# Altium PCB PCB_ESP32.PcbDoc (part 2 of 2)
Units mil, origin at the board's own origin, x right, y up, seen from the top; angles counter-clockwise.
Board outline 2930 x 1000 mil, 4 copper layers (Top Layer, Layer 1, Layer 2, Bottom Layer), stack 63.142 mil thick; 64 components, 73 nets, 299 pads, 165 vias.
Unrouted connection lines stored in the file: 3.
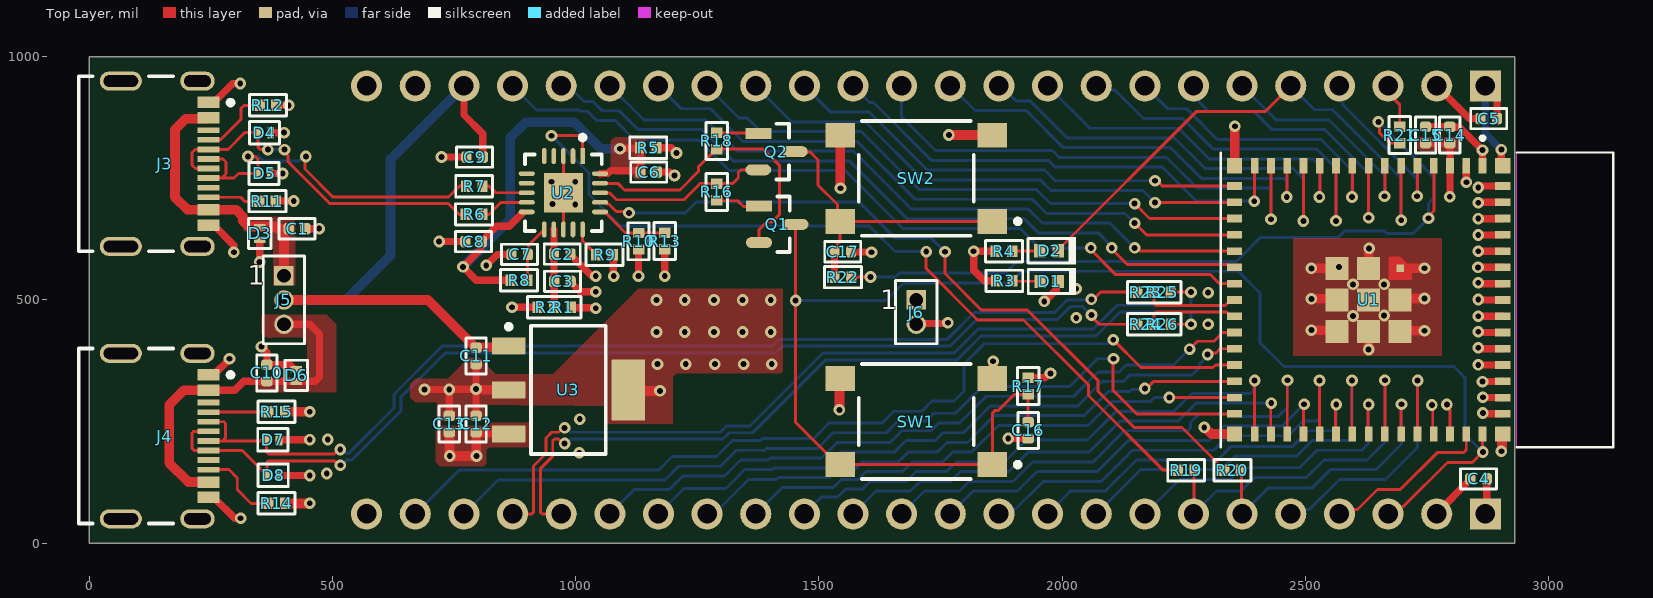
[diagram p0: Top Layer view]

## Part data (continued)
U3: "IC REG LINEAR 3.3V 1.5A SOT223-4", Case/Package=SOP, Dropout Voltage1-Max=550mV, Dropout Voltage1-Nom=340mV, Input Voltage Absolute-Max=20V, LCSC Part Number=C181262, Manufacturer="Texas Instruments", Min Input Voltage=3.8V, Operating Temperature, TJ-Max=125°C, Operating Temperature, TJ-Min=-40°C, Output Current1-Max=1.5A, Output Voltage1-Max=3.4V, Output Voltage1-Min=3.2V, Output Voltage1-Nom=3.3V, Package Body Material=Plastic, Package Shape=Rectangular, Package Style="SMALL OUTLINEMeter", Peak Reflow Temperature (Cel)=260°C, Supplier Part Number=296-24897-1-ND, Voltage Tolerance-Max=3%, Adjustability=FIXED, Category="Voltage Regulators - Linear", Channels=1, ComponentLink1Description=https://www.ti.com:443/lit/ds/symlink/tl1963a.pdf?src-supplier=IHS+Markit, ComponentLink1URL=https://www.ti.com:443/lit/ds/symlink/tl1963a.pdf?src-supplier=IHS+Markit, ComponentLink2Description=https://datasheet.ciiva.com/2046/-2046068.pdf?src-supplier=Digikey, ComponentLink2URL=https://datasheet.ciiva.com/2046/-2046068.pdf?src-supplier=Digikey, Height - Seated (Max)=1.8mm, JESD-30 Code=R-PDSO-G4, JESD-609 Code=e3, Length=6.5mm, Line Regulation-Max=0.01%, Load Regulation-Max=0.07%, Manufacturer Part Number=TL1963A-33DCYR, Max Supply Voltage=20V, Moisture Sensitivity Level=2, Number of Outputs=1, Packaging="Tape and Reel", Pins=4, Pricing="1=2.91, 10=2.614, 25=2.4712, 100=2.1417, 250=2.03188, 500=1.8232, 1000=1.53764 (USD)", Qualification Status="Not Qualified", Reach SVHC Compliant=Yes, Regulator Type="FIXED POSITIVE SINGLE OUTPUT LDO REGULATOR", RoHS=Yes, RoHS Compliant=Yes, Stock=4105, Supplier=Digikey, Surface Mount=Yes, Technology=BIPOLAR, Terminal Finish=Tin, Terminal Form="Gull Wing", Terminal Pitch=2.3mm, Terminal Position=DUAL, Width=3.5mm

## Via types
v1: diameter 24, hole 12, Top Layer to Bottom Layer, tented both sides, 165 vias

## Nets (pads, with @x,y where several pads share a name; then routed paths per layer and width w, separated by ;. In a path a pad name is that pad's centre, name@x,y a point inside that pad or via, vN(x,y) a via of type N, cw(c..) or ccw(c..) an arc to the next point about the centre after c; other vN are vias at no path point)
+3V3: C4.2 C5.2 C14.2 C15.2 J1.2 J2.1 J6.2 R2.1 R3.2 R4.2 R5.1 R17.2 U1.3 | length 4357.4
  Top Layer w15: v1(868.94,485.06) R2.1 ; R5.1 1196,813 v1(1207,802) ; J6.2 1701.5,451.5 1763.5,451.5 v1(1765,453) ; R4.2 v1(1818,600) 1818,561.22 1839.97,539.25 1863.74,539.25 R3.2 ; R17.2 1934.16,340 1934.31,339.85 1964.26,339.85 1973.4,349 v1(1975.84,349) ; C15.2 C14.2 2797,819.12 2797.18,818.94 2797.18,775.77 U1.3 2797.18,775.41 2797.18,712.18 v1(2797,712) ; J1.2 2837,873 C5.2 ; J2.1@2866.93,63.07 J2.1 2872.93,62.93 C4.2
  Layer 1 w30: v1(1765,453) 1871.84,453 v1(1975.84,349) ; 2797,341.5 2828,310.5 2828,155 2863.57,119.43 2870,119.43 J2.1 J2.1@2863.57,66.43
  Layer 1 w40: v1(868.94,485.06) 902.06,485.06 1063,646 1063,717 1148,802 v1(1207,802) 1249,802 1305,746 1454,746 1541,659 1759,659 ; v1(1765,453) 1765,517 1818,570 v1(1818,600) 1759,659 ; J1.2 2770,839 ; 2797,341.5 2797,713.08 2770,740.08 2770,839 ; 1759,659 1897,797 2728,797 2770,839
+3V3_FTDI: C6.2 C8.2 R5.2 R8.1 U2.10 U2.20 | length 1032.7
  Top Layer w15: R8.1@866.5,539.47 864.55,539.47 863.37,540.65 795.35,540.65 v1(768,568) 803.8,603.8 803.8,616.87 C8.2 806.93,621.18 837.01,651.26 863.19,651.26 U2.10@890.14,678.22 ; U2.20 1050.31,760 1066,760 1072,766 1130.14,766 C6.2@1132.57,763.57 ; v1(1091,811) 1092,812 1130.99,812 R5.2 1132.57,812.43 C6.2@1132.57,763.57 ; C6.2@1132.57,763 C6.2@1132.57,763.57 ; C6.2 C6.2@1132.57,763.57
  Bottom Layer w20: v1(768,568) 768,568.25 862,662.25 865,665.25 865,833 897.5,865.5 996.5,865.5 1051,811 v1(1091,811)
+3V3_REG: C12.2 C13.2 J6.1 U3.3 | length 1293.1
  Top Layer w20: C13.2 740.5,227.57 740.5,179.5 v1(741,179) v1(796,179) ; v1@795.5,179.5 795.5,227.57 795.63,227.44 858.98,227.44 U3.3
  Layer 1 w40: 1427,316 1611,500 J6.1
  Layer 1 w60: v1@797,178 841,134 1245,134 1427,316
+5V: C9.2 C11.2 J1.22 J5.2 R1.1 U3.1 | length 2240.9
  Top Layer w15: J1.22 770,880.36 808.98,841.38 C9.2 ; R1.1 991,484 1040,484 v1(1041,483)
  Top Layer w20: J5.2 695.75,500 793.82,401.93 C11.2 795.63,402.56 858.98,402.56 U3.1
  Layer 1 w20: J1.22 666,836 666,582 810,438 996,438 v1(1041,483)
  Bottom Layer w20: J5.2 528,500 619,591 619,789 J1.22
+5V_VBUS1: C1.2 D3.2 J3.A4B9 J3.B4A9 J5.1 R10.2 | length 1525.4
  Top Layer w15: 1128.96,561.04 R10.2
  Top Layer w20: J3.A4B9 243.03,872.68 198.68,872.68 176,850 176,711 201.49,685.51 J3.B4A9 301.27,685.51 316,670.78 316,662.5 327.72,650.78 381.22,650.78 385.38,646.62 C1.2 410.08,645.44 400,635.36 J5.1
  Layer 1 w30: J5.1 468,550 472,546 ; 999,376 1128,505 1128.96,505.96 v1(1128.96,549)
  Layer 1 w40: 472,546 472,545 641,376 999,376
+5V_VBUS2: C10.2 D6.2 J4.A4B9 J4.B4A9 J5.3 | length 719
  Top Layer w15: J4.A4B9 298.89,314.49 317.47,333.07 C10.2 402.2,333.07 402.47,332.8 425,332.8 464.21,332.8 473,341.58 473,430 453,450 J5.3
  Top Layer w20: J4.B4A9 203.49,125.51 164,165 164,284 194.49,314.49 J4.A4B9
+VCC_FTDI: C2.2 C3.2 R1.2 R2.2 U2.12 | length 160.4
  Top Layer w15: U2.12 955.08,644.72 955.08,625 955.08,594.51 955.36,594.23 955.36,538.13 C3.2 955.72,537.77 955.72,485.26 R1.2
BTN_GPIO0: C17.2 Q2.3 R22.1 SW2.1 SW2.2 | length 632.7
  Top Layer w6: Q2.3 1451,804 1482,804 1498,788 1498,736 1538,696 1538,666.92 SW2.2 ; C17.2 1537.24,604.24 1537.24,614.56 1543.5,620.83 SW2.2 ; SW2.1 SW2.2
  Top Layer w15: R22.1 C17.2
CHIP_PU: C16.2 J2.3 Q1.3 R17.1 SW1.1 SW1.2 U1.45 | length 3105
  Top Layer w6: Q1.3 1452,655.01 v1(1452,499) 1451.6,498.6 1451.6,248.4 1538.58,161.42 SW1.2 SW1.1 1856.5,267.14 1862.35,273 1869.1,273 1902.09,305.98 R17.1 C16.2 ; J2.3 2684.61,60 2699.85,75.23 2701.23,75.23 2792,166 2843,166 2864.29,187.29 U1.45
  Bottom Layer w6: v1(1452,499) 1637.79,499 1673.79,535 1893,535 1917,559 2362,559 2407,514 2407,412 2456.04,362.96 2789.96,362.96 2790,363 2805.56,363 2828.42,340.14 2828.42,223.16 2864.29,187.29 v1(2865,187.29)
CON1_USB_N: D4.2 J3.A7 J3.B7 R6.1 | length 738.5
  Top Layer w6.03: J3.A7 244.68,770 218,770 211,777 211,803 217,809 244.31,809 J3.B7 285.11,809.53 319.59,844 D4.2 347,814 352,809 v1(367,809) ; v1@401,807.16 401,804.14 408.2,796.94 408.2,784.19 494.54,697.85 738.37,697.85 760.4,675.82 R6.1
  Bottom Layer w6.03: v1(367,809) v1(401,809)
CON1_USB_P: D5.2 J3.A6 J3.B6 R7.1 | length 775.1
  Top Layer w6.03: J3.A6 274.84,789.84 281,783.68 281,759 273,751 245.37,751 J3.B6 297.19,750.47 306.72,760 D5.2 346.2,790 341.2,795 v1(326.2,795) ; v1@445,793 443.29,791.29 443.29,768.94 500.35,711.88 738.49,711.88 760.52,733.9 R7.1
  Bottom Layer w6.03: v1(326.2,795) 348.45,795 357.47,785.99 431.12,785.99 440.14,795 v1(445,795)
CON2_USB_N: D7.2 J4.A7 J4.B7 R23.1 | length 2174.3
  Top Layer w6.03: J4.A7 273.46,210.16 ; J4.B7 276.47,249.53 280,246 280,216.69 273.46,210.16 ; v1(515.73,192.57) 512.74,192.57 503.48,183.31 368.24,183.31 364.38,187.17 D7.2 354.48,212.75 351.88,210.16 273.46,210.16 ; v1(2060,501.09) 2064.13,501.09 2079.04,516 R23.1
  Bottom Layer w6.03: v1(515.73,192.57) 520.34,192.57 528.24,184.67 533.24,184.67 626.26,277.69 626.26,305.65 725.66,405.05 1404.59,405.05 1418.53,418.99 1763.53,418.99 1818.61,474.06 1984.61,474.06 2010.65,500.11 2059.01,500.11 v1(2060,501.09)
CON2_USB_P: D8.2 J4.A6 J4.B6 R24.1 | length 2232.9
  Top Layer w6.03: J4.A6 214.53,229.84 211,226.31 211,195 215.53,190.47 J4.B6 314.41,190.47 D8.2@364.71,140.17 ; D8.2 D8.2@364.71,140.17 ; v1(516,160.29) 512.47,160.29 503.48,169.28 368.24,169.28 364.71,165.75 D8.2@364.71,140.17 ; v1(2060.43,469.1) 2060.43,465.57 2076,450 R24.1
  Bottom Layer w6.03: v1(516,160.29) 518.51,160.29 528.85,170.64 539.05,170.64 640.29,271.87 640.29,299.83 731.47,391.01 1410.4,391.01 1424.34,404.95 1769.34,404.95 1824.42,460.03 1990.42,460.03 2016.46,486.07 2042.47,486.07 2059.45,469.1 v1(2060.43,469.1)
CON_ESP_USB_N: J2.21 R25.1 | length 1721.5
  Top Layer w6.03: J2.21 909.45,60 912.98,63.53 912.98,158.59 938.66,184.26 938.66,216.26 950.41,228.01 964.48,228.01 973.47,237 v1(977,237) ; R25.1 v1(2265,516)
  Bottom Layer w6.03: v1(977,237) 980.53,237 989.52,228.01 1296.67,228.01 1309.7,241.05 1358.2,241.05 1508.08,390.93 1778.25,390.93 1827.37,440.05 2063.92,440.05 2112.91,489.03 2261.47,489.03 2265,492.56 v1(2265,516)
CON_ESP_USB_P: J2.20 R26.1 | length 1696.3
  Top Layer w6.03: J2.20 930.55,60 927.02,63.53 927.02,152.78 952.69,178.45 952.69,210.45 956.22,213.99 964.48,213.99 973.47,205 v1(977,205) ; R26.1 v1(2265,450)
  Bottom Layer w6.03: v1(977,205) 980.53,205 989.52,213.99 1302.48,213.99 1315.51,227.01 1364.01,227.01 1513.89,376.89 1784.06,376.89 1833.18,426.01 2069.73,426.01 2118.72,475 2261.47,475 2265,471.47 v1(2265,450)
CON_GPIO0: J1.3 R21.1 | length 94.9
  Top Layer w6: J1.3 2670,925.39 2694,901.39 R21.1@2694,855.01
DTR_FTDI: Q2.2 R16.1 U2.18 | length 362.9
  Top Layer w6: U2.18 1050.23,720.09 1069.66,720.09 1079,710.75 1083.74,706.01 1083.99,706.01 1222.28,706 1255.3,739.02 R16.1 1322,739 1334,751 1334,761.74 1339.86,767.6 Q2.2
ESP_USB_N: R23.2 R25.2 U1.23 | length 194.9
  Top Layer w6.03: R23.2 2189,492.53 2192.53,489 2335.57,489 2346.57,500 U1.23
ESP_USB_P: R24.2 R26.2 U1.24 | length 191.8
  Top Layer w6.03: R26.2 2189,471.44 2192.53,474.97 2338.14,474.97 2346.57,466.54 U1.24
FTDI_RESET: C7.2 R8.2 U2.11 | length 118.6
  Top Layer w6: R8.2 901.06,541.2 901.06,592.99 902.91,594.84 902.91,612.59 U2.11
FTDI_USB_N: R6.2 U2.9 | length 101.4
  Top Layer w6.03: R6.2 821.7,675.82 846.51,700.63 U2.9
FTDI_USB_P: R7.2 U2.8 | length 96.6
  Top Layer w6.03: R7.2 821.83,733.9 835.41,720.32 U2.8
GND: C1.1 C2.1 C3.1 C4.1 C5.1 C6.1 C7.1 C8.1 C9.1 C10.1 C11.1 C12.1 C13.1 C14.1 C15.1 C16.1 C17.1 D1.1 D3.1 D4.1 D5.1 D6.1 D7.1 D8.1 J1.1 J1.23 J2.2 J2.24 J3.A1B12 J3.B1A12 J3.S1 J3.S2 J3.S3 J3.S4 J4.A1B12 J4.B1A12 J4.S1 J4.S2 J4.S3 J4.S4 R9.2 R11.1 R12.1 R13.2 R14.1 R15.1 SW1.3 SW1.4 SW2.3 SW2.4 U1.1 U1.2 U1.42 U1.43 U1.46 U1.47 U1.48 U1.49 U1.50 U1.51 U1.52 U1.53 U1.54 U1.55 U1.56 U1.57 U1.58 U1.59 U1.60 U1.61 U1.62 U1.63 U1.64 U1.65 U1.66 U1.67 U1.68 U1.69 U1.70 U1.71 U1.72 U1.73 U2.3 U2.13 U2.21 U3.2 U3.4 | length 4279.5
  Top Layer w6: U2.13 U2.21 U2.3 ; v1(2760,284) 2761.95,282.05 2761.95,226.67 U1.42@2764.21,224.41 ; v1(2791,285) 2791,281.21 2797.36,274.85 U1.43@2797.36,224.91
  Top Layer w15: J4.B1A12 255.67,94.02 298.68,51 v1(311,51) ; J4.A1B12 255.67,345.98 288,378.32 v1(288,379) ; J3.B1A12 255.67,654.02 297,612.68 v1(297,598) ; J3.A1B12 255.67,905.98 294.68,945 v1(310,945) ; v1(350,578) 350.16,578.16 D3.1@350.16,623.28 ; v1(354,404) 365,393 C10.1 412.17,366.93 421.3,357.8 D6.1 ; D5.1 v1(397,760) ; D4.1 v1(400,844) ; R11.1 v1(420.25,703.25) ; R12.1 v1(410,900) ; D7.1 v1(453,212.75) ; D8.1@391.05,139.42 D8.1 390.63,139.61 391.24,139 v1(453,139) ; C1.1 v1(472.38,646.62) ; v1(689,316) v1(740,316) C13.1 ; v1(719,620) C8.1 ; v1(724,794) 724.19,793.81 C9.1 ; v1@740,316.5 v1@795,316.5 ; C12.1 v1@795,316.5 ; v1@796,317 795.5,316.5 v1@795,316.5 ; C11.1@799.31,364.94 796.18,368.07 C11.1 v1(795,317) v1@795,316.5 ; v1(816,571) 838.54,593.54 C7.1 ; U3.2@861.47,315.5 U3.2 ; C2.1 989.12,593.15 1033.27,549 v1(1041,549) ; C3.1 989.32,536.85 1009.17,517 v1(1041,517) ; R9.2 1077.15,592.33 1077.15,550.85 v1@1078,550 ; C6.1 1193.56,763 1200.56,756 v1(1203,756) ; R13.2 1182.88,559.12 v1@1183,559 ; C17.1 1566.36,598.5 1607.5,598.5 v1(1608,598) ; SW1.3 SW1.3@1859,341.09 ; v1(1889,215) C16.1 ; v1(1963,497.07) 1964.01,497.07 1987.69,520.75 1987.69,533.69 D1.1 ; U1.64@2354.24,224.2 U1.64 ; C15.1 C14.1 2797.94,854.98 2817.02,854.98 v1(2864,808) U1.1@2864,777.22 ; J2.2 2770,61.75 2839.07,130.82 C4.1 ; U1.2 2830.91,775.5 v1@2830.91,742.09 ; J1.1@2845.5,915.5 J1.1 2893.93,916.07 C5.1 ; v1@2854.54,500.79 2855.33,500 U1.53 ; v1(2855,567) v1(2855,567) 2905.59,566.96 U1.55 ; v1(2855.42,401.71) 2857.86,401.71 2859.96,399.61 U1.50 ; v1(2855.42,434.58) 2856.93,433.07 U1.51 ; v1(2855.42,600.1) 2855.57,600.25 2905.48,600.25 U1.56 ; v1(2855.42,633.53) 2855.59,633.69 2905.47,633.69 U1.57 ; v1(2855.42,667.1) 2855.53,667.21 2905.52,667.21 U1.58 ; v1(2855.42,466.57) U1.52@2905.61,466.55 ; v1@2856.23,700.79 U1.59 ; v1@2857.86,533.31 U1.54@2906.55,533.31 ; v1@2857.93,366.07 U1.49@2906.63,366.07 ; v1@2862.01,734.25 U1.60 ; v1(2864,332) 2864.34,332.34 2905.29,332.34 U1.48 ; v1(2865,267.46) 2866.34,266.12 2905.26,266.12 U1.46 ; v1(2865,300) 2865.41,299.59 2905.26,299.59 U1.47 ; v1(2903,189) v1@2904.32,190.32 ; v1(2903,809) 2903,778.22 U1.62 ; U1.65@2904.32,223.09 U1.65
  Top Layer w20: R14.1 452.69,81.69 v1(453,82) ; R15.1@402.35,270 v1(453,270) ; v1@796,317 797.08,317 798.58,315.5 U3.2@861.47,315.5 ; U3.4 1110.03,313 v1(1173,313) ; SW1.4@1522.99,322.99 SW1.4@1538.58,338.58 ; v1(1542,274) 1542,337.08 SW1.4 ; SW2.4 1543.5,731.41 1544.33,730.58 v1(1544.33,729.5) ; v1(1767,839) SW2.3@1856.08,839 ; v1(1858,373.95) 1858,342.09 SW1.3@1859,341.09 ; v1(2291.96,238) 2293.05,238 2306.84,224.2 U1.64@2354.24,224.2 ; U1.63 2354.72,775.87 2354.72,856.72 v1(2355,857) ; v1(2512.41,437.94) U1.73@2562.53,437.94 ; v1@2513.2,502.25 U1.72@2563.32,502.25 ; v1@2514.96,564.96 U1.71 ; U1.69@2629.96,564.92 2630.52,565.48 2630.52,605.52 v1(2631,606) ; v1(2630,398) U1.70@2630.02,440.06 ; U1.66@2694.92,565.04 v1(2745.04,565.04) ; U1.68@2695.41,436.82 v1@2745.53,436.82 ; U1.67@2697.01,502.89 v1@2747.13,502.89 ; v1@2904.32,190.32 U1.65@2904.32,223.09
  Bottom Layer w15: J1.1 2870,842 v1(2903,809)
  other v1: 488,143 1007,186 490,213 1008,255 2855.42,366.54 1168,368 1226,368 1286,368 1345,368 1403,368 1166,434 1224,434 1284,434 1343,434 1401,434 2745.04,436.82 2300,450 2029,463.06 2598,467 2662,468 1166,500 1224,500 1284,500 1343,500 1401,500 2855.42,500.79 2512.41,502.25 2745.04,502.89 2300,515 2029,523.12 2598,532 2662,532 2855.42,535.24 1078,549 1183,549 2512.41,564.96 2569,568 999,696 952,697 2855.42,699.98 2855.42,731.17 2831,742 950,743 999,743
GPIO0: R21.2 R22.2 U1.4 | length 1675.5
  Top Layer w6: R22.2 v1(1606,547) ; v1(2650.09,866.09) 2652.77,863.41 2652.77,843.23 2673.05,822.95 2693.05,822.95 R21.2 ; v1(2753,668) 2753,671.79 2764.08,682.87 U1.4@2764.08,773.61
  Bottom Layer w6: v1(1606,547) 1657.5,547 1665.5,555 1882.9,555 1906.9,579 2358,579 2407,628 2566.8,628 2580.84,642.04 2661.57,642.04 2666.8,636.81 2721.81,636.81 v1(2753,668) 2753,698.01 2764.08,709.09 2764.08,752.1 v1(2650.09,866.09)
GPIO1: J1.4 U1.5 | length 354.6
  Top Layer w6: v1@2730.62,712.23 U1.5@2730.62,773.61
  Bottom Layer w6: J1.4 2577.23,932.77 2577.23,900.77 2729.83,748.17 v1(2729.83,713.02)
GPIO2: D2.1 J1.5 U1.6 | length 1121.6
  Top Layer w6: D2.1 1991.7,602.97 2275.73,887 2417,887 J1.5 ; v1(2697.02,663.81) U1.6@2697.02,773.66
  Bottom Layer w6: J1.5 2519,891 2556,891 2697.02,749.98 v1(2697.02,663.81)
GPIO3: J1.6 U1.7 | length 473.3
  Top Layer w6: v1@2663.56,712.28 U1.7@2663.56,773.66
  Bottom Layer w6: J1.6 2440,870 2548.72,870 2662.77,755.94 v1(2662.77,713.07)
GPIO4: J1.7 U1.8 | length 641.4
  Top Layer w6: v1@2630.05,669.05 U1.8@2630.05,772.34
  Bottom Layer w6: J1.7 2280.33,929.67 2280.33,908.67 2302,887 2394.72,887 2431.72,850 2540.43,850 2630.05,760.38 v1(2630.05,669.04)
GPIO5: J1.8 U1.9 | length 613.7
  Top Layer w6: v1@2596.59,710.97 U1.9@2596.59,772.35
  Bottom Layer w6: J1.8 2217,893 2256,893 2319,830 2532.15,830 2595.8,766.35 v1(2595.8,711.76)
GPIO6: J1.9 U1.10 | length 781.3
  Top Layer w6: v1(2563.12,662.5) U1.10@2563.12,772.35
  Bottom Layer w6: J1.9 2078.23,931.77 2108.23,931.77 2167,873 2247.72,873 2310.72,810 2523.86,810 2563.12,770.75 v1(2563.12,662.5)
GPIO7: J1.10 U1.11 | length 752.8
  Top Layer w6: v1@2529.65,710.97 U1.11@2529.65,772.35
  Bottom Layer w6: J1.10 2057,853 2239.43,853 2302.43,790 2515.58,790 2528.87,776.71 v1(2528.87,711.76)
GPIO8: J1.11 U1.12 | length 901.7
  Top Layer w6: v1(2495.92,662.23) U1.12@2495.92,772.08
  Bottom Layer w6: J1.11 1874.86,940 1905.67,909.2 1934.33,909.2 2010.53,833 2231.15,833 2294.15,770 2475,770 2495.92,749.08 v1(2495.92,662.23)
GPIO9: J1.12 U1.13 | length 866.8
  Top Layer w6: v1@2462.46,710.7 U1.13@2462.46,772.08
  Bottom Layer w6: J1.12 1820.8,889.2 1926.05,889.2 2002.25,813 2222.86,813 2285.86,750 2455.81,750 2461.67,744.14 v1(2461.67,711.48)
GPIO10: J1.13 U1.14 | length 1054.2
  Top Layer w6: v1(2429.25,665.75) U1.14
  Bottom Layer w6: J1.13 1670,876.27 1739.27,807 1979.96,807 1993.96,793 2214.58,793 2277.58,730 2423.39,730 2429.25,724.14 v1(2429.25,665.75)
GPIO11: J1.14 U1.15 | length 996.1
  Top Layer w6: v1(2395,703) 2395.79,703.79 U1.15
  Bottom Layer w6: J1.14 1604,906 1611.99,906 1730.99,787 1971.68,787 1985.68,773 2206.29,773 2276.29,703 v1(2395,703)
GPIO12: J1.15 U1.16 | length 969.7
  Top Layer w6: v1(2191,745) 2194.79,745 2205.54,734.25 U1.16
  Bottom Layer w6: J1.15 1524,886 1603.71,886 1722.71,767 1963.4,767 1985.4,745 v1(2191,745)
GPIO13: J1.16 U1.17 | length 1084.2
  Top Layer w6: v1(2191,700) 2191.39,700.39 2354.06,700.39 U1.17
  Bottom Layer w6: J1.16 1444,866 1595.42,866 1714.42,747 1955.11,747 1977.11,725 2166,725 v1(2191,700)
GPIO14: J1.17 U1.18 | length 1197.4
  Top Layer w6: v1(2149,698) 2179.68,667.32 U1.18
  Bottom Layer w6: J1.17 1335.82,874.18 1352.39,874.18 1380.57,846 1587.14,846 1706.14,727 1946.83,727 1975.83,698 v1(2149,698)
GPIO15: J1.18 U1.19 | length 1311.3
  Top Layer w6: v1(2149,658) 2173.14,633.86 U1.19
  Bottom Layer w6: J1.18 1217,893 1277,893 1344,826 1578.85,826 1697.85,707 1938.54,707 1967.54,678 2129,678 v1(2149,658)
GPIO16: J1.19 U1.20 | length 1425.1
  Top Layer w6: v1(2149,607) 2152.79,607 2159.39,600.39 U1.20
  Bottom Layer w6: J1.19 1140,870 1268,870 1332,806 1570.57,806 1689.57,687 1930.26,687 1959.26,658 2098,658 v1(2149,607)
GPIO17: J1.20 U1.21 | length 1539.9
  Top Layer w6: v1@2102,605 2134,573 2340.5,573 2346.57,566.93 U1.21
  Bottom Layer w6: J1.20 984.61,940 1016.61,908 1035.53,908 1054.53,889 1089.28,889 1128.28,850 1259.72,850 1323.72,786 1562.28,786 1681.28,667 1921.97,667 1950.97,638 2074,638 2102,610 v1(2102,607)
GPIO18: J1.21 U1.22 | length 1651.2
  Top Layer w6: v1@2059,603 2110,552 2305.17,552 2323.7,533.46 U1.22
  Bottom Layer w6: J1.21 919.5,890.5 1006.86,890.5 1009.36,888 1024,888 1043,869 1081,869 1121,829 1252.43,829 1315.43,766 1554,766 1673,647 1913.69,647 1953.69,607 v1(2059,607)
GPIO21: J2.19 U1.25 | length 1438.6
  Top Layer w6: v1@2262,400 2263.09,400 2278.09,415 2312,415 2329.84,432.84 2354.22,432.84 U1.25
  Bottom Layer w6: J2.19 1119.93,109.93 1191.64,109.93 1219.72,138 1305.72,138 1338.72,171 1396.15,171 1399.95,174.8 1505.2,174.8 1537.4,207 1646.58,207 1670.72,231.14 1730.57,231.14 1746.43,247 1788.96,247 1843.96,302 2023.72,302 2073.86,352.14 2117.14,352.14 2131,366 2229,366 v1@2262,399
  other v1: 2262,398.91
GPIO26: J2.18 U1.26 | length 1331.5
  Top Layer w6: v1(2299.09,388) 2301.77,390.68 2315.96,390.68 2324.89,399.61 U1.26
  Bottom Layer w6: J2.18 1222.57,112.57 1308.57,112.57 1347,151 1404.43,151 1408.23,154.8 1513.48,154.8 1545.68,187 1654.86,187 1679.01,211.14 1738.86,211.14 1754.72,227 1797.25,227 1852.25,282 2032,282 2082.14,332.14 2126,332.14 2139.86,346 2268,346 2281.92,359.92 2281.92,367.04 2299.09,384.21 v1(2299.09,388)
GPIO33: J2.17 U1.28 | length 1197.4
  Top Layer w6: v1(2170,318) 2173.79,318 2188.47,332.68 U1.28
  Bottom Layer w6: J2.17 1284.28,60 1355.28,131 1412.72,131 1416.52,134.8 1521.77,134.8 1537.96,151 1572.43,151 1588.43,167 1663.15,167 1683.15,187 1743,187 1763,207 1805.53,207 1860.53,262 2045,262 2095.14,312.14 2139.18,312.14 2143,315.96 2167.96,315.96 v1(2170,318)
GPIO34: J2.16 U1.29 | length 1083.8
  Top Layer w6: v1(2220.41,299.59) 2220.6,299.4 2354.26,299.4 U1.29
  Bottom Layer w6: J2.16 1424.8,114.8 1530.05,114.8 1546.25,131 1580.72,131 1596.72,147 1671.43,147 1691.43,167 1754.43,167 1774.43,187 1813.82,187 1868.82,242 2053.72,242 2102.72,291 2181.18,291 2189.78,299.59 v1(2220.41,299.59)
GPIO35: J2.15 U1.31 | length 1158.7
  Top Layer w6: U1.31@2395.27,224.92 v1@2395.27,333.78
  Bottom Layer w6: J2.15 1504.8,94.8 1538.33,94.8 1554.53,111 1589,111 1605,127 1679.72,127 1699.72,147 1762.72,147 1782.72,167 1881.72,167 1926.72,212 2052,212 2111,271 2230,271 2266.78,307.78 2387.21,307.78 2393.07,313.64 2393.07,331.57 v1(2395.75,334.25)
GPIO36: J2.14 U1.32 | length 1017.7
  Top Layer w6: U1.32@2428.74,224.92 2428.74,286.52 v1(2430,287.78)
  Bottom Layer w6: J2.14 1617,107 1688,107 1708,127 1771,127 1791,147 1890,147 1930,187 2055.43,187 2119.43,251 2238.5,251 2275.28,287.78 v1(2430,287.78)
GPIO37: J2.13 U1.33 | length 1059.5
  Top Layer w6: U1.33 v1@2462.72,334.4
  Bottom Layer w6: J2.13 1717,107 1788.72,107 1808.72,127 1899,127 1939,167 2063.72,167 2127.72,231 2258.14,231 2264,236.86 2264,248.22 2280.78,265 2360.44,265 2364.66,260.78 2444.32,260.78 2463.19,279.66 v1(2463.19,334.88)
GPIO38: J2.12 U1.34 | length 882.6
  Top Layer w6: U1.34 2496.18,284.36 v1(2497.44,285.62)
  Bottom Layer w6: J2.12 1817,107 1908,107 1948,147 2072,147 2136,211 2303.15,211 2332.93,240.78 2452.6,240.78 v1(2497.44,285.62)
GPIO39: J2.11 U1.35 | length 928
  Top Layer w6: v1@2528.64,333.86 2528.64,225.42 U1.35
  Bottom Layer w6: J2.11 1880.33,70.33 1904.33,70.33 1961,127 2080.43,127 2144.43,191 2311.43,191 2341.22,220.78 2464.78,220.78 2495,251 2523.25,251 2529.11,256.86 v1(2529.11,334.33)
GPIO40: J2.10 U1.36 | length 776.5
  Top Layer w6: U1.36 2562.1,225.42 2562.1,283.82 v1(2563.36,285.08)
  Bottom Layer w6: J2.10 2017,107 2088.72,107 2152.72,171 2319.72,171 2347.72,199 2474,199 2506,231 2557.51,231 2563.36,236.86 v1(2563.36,285.08)
GPIO41: J2.9 U1.37 | length 816.9
  Top Layer w6: v1@2595.27,333.78 2595.27,225.71 U1.37
  Bottom Layer w6: J2.9 2161,151 2328,151 2356,179 2482.28,179 2514.28,211 2588,211 2595.75,218.75 v1(2595.75,334.25)
GPIO42: J2.8 U1.38 | length 661.8
  Top Layer w6: v1(2630,285) 2628.74,283.74 2628.74,225.71 U1.38
  Bottom Layer w6: J2.8 2241,131 2345,131 2363,149 2363,149.14 2368.86,155 2488,155 2524,191 2616,191 2630,205 v1(2630,285)
GPIO45: J2.5 U1.41 | length 564.7
  Top Layer w6: U1.41@2730.75,224.41 v1(2730.75,334.25)
  Bottom Layer w6: J2.5 2478.73,68.73 2507.73,68.73 2570,131 2665,131 2730.75,196.75 v1(2730.75,334.25)
GPIO46: J2.4 U1.44 | length 348
  Top Layer w6: J2.4 2579.23,69.23 2607.23,69.23 2648,110 2695,110 2771,186 2824.97,186 2830.83,191.86 U1.44
GPIO47: J2.23 U1.27 | length 1891
  Top Layer w6: v1(2105,418) 2162,361 2310.28,361 2315.42,366.14 U1.27
  Bottom Layer w6: J2.23 760,150 1170,150 1198,178 1289.15,178 1322.15,211 1379.58,211 1383.38,214.8 1488.63,214.8 1520.83,247 1630.01,247 1654.15,271.14 1711.72,271.14 1732.55,291.97 1777.37,291.97 1798.2,312.8 1798.2,368.38 1839.82,410 2093.21,410 2101.21,418 v1(2105,418)
GPIO48: J2.22 U1.30 | length 1803.5
  Top Layer w6: v1(2105.68,379.14) 2104.07,377.54 2104.07,314.93 2153.25,265.75 U1.30
  Bottom Layer w6: J2.22 839.93,129.93 1183.36,129.93 1211.43,158 1297.43,158 1330.43,191 1387.86,191 1391.67,194.8 1496.91,194.8 1529.11,227 1638.29,227 1662.44,251.14 1720,251.14 1735.86,267 1780.68,267 1835.68,322 2015.43,322 2072.57,379.14 v1(2105.68,379.14)
NetD1_2: D1.2 R3.1 | length 57
  Top Layer w6: R3.1 1898.5,538.5 1954.1,538.5 D1.2
NetD2_2: D2.2 R4.1 | length 57.7
  Top Layer w6: R4.1 1897.52,600.5 1953.8,600.5 D2.2
NetJ3_A5: J3.A5 R12.2 | length 147.5
  Top Layer w6: J3.A5 245.75,830.12 270.16,830.12 312,871.96 312,894.14 317.86,900 R12.2
NetJ3_B5: J3.B5 R11.2 | length 108.4
  Top Layer w6: J3.B5 311.04,711.1 320.14,702 347.75,702 R11.2
NetJ4_A5: J4.A5 R15.2 | length 123.4
  Top Layer w6: J4.A5 245.41,269.78 R15.2@367.99,269.78
NetJ4_B5: J4.B5 R14.2 | length 166
  Top Layer w6: J4.B5 286.9,151.1 304,134 304,110 332.31,81.69 R14.2
NetQ1_1: Q1.1 R16.2 | length 92.5
  Top Layer w6: R16.2 1291,704 1333,704 1345,692 1375.93,692 Q1.1
NetQ2_1: Q2.1 R18.2 | length 85.8
  Top Layer w6: R18.2 1290.81,843.21 1374.35,843.21 Q2.1
NetR9_1: R9.1 U2.15 | length 64.2
  Top Layer w6: U2.15 1013.96,625 1013.96,621.51 1035.48,599.99 1036.66,599.99 1042.29,594.36 R9.1
RTS_FTDI: Q1.2 R18.1 U2.19 | length 610.5
  Top Layer w6: U2.19 1050.23,739.77 1079,739.77 1086.23,739.77 1100,726 1214,726 1252.59,764.59 1252.59,773.78 1288.82,810 R18.1 1385.35,810 1418.47,776.88 1418.47,675.34 1402.93,659.81 1392.28,659.81 1376.75,644.28 Q1.2
RXD_FTDI: R19.2 U2.1 | length 1734.8
  Top Layer w6: v1(950,837.5) 950.5,838 1008.1,838 1013.96,832.14 U2.1 ; v1(1720.41,599.41) 1720.41,564.59 1826,459 1920.72,459 2054,325.72 2054,303.72 2207.72,150 R19.2
  Bottom Layer w6: v1(950,837.5) 950.5,837.5 1027,761 1027,717 1092,652 1603.44,652 1656.03,599.41 v1(1720.41,599.41)
TXD_FTDI: R20.2 U2.17 | length 1557.4
  Top Layer w6: U2.17@1061.53,700.4 1064.99,696.94 1068.06,696.94 1079,686.01 1083.33,681.68 1106.69,681.68 v1(1109.37,679) ; v1(1759,599) 1759,554.28 1834.28,479 1929,479 2074,334 2074,312 2148,238 2246.17,238 2332.99,151.18 R20.2
  Bottom Layer w6: v1(1109.37,679) 1225,679 1247,701 1582.73,701 1656.73,627 1731,627 v1(1759,599)
U0RXD: J2.6 R20.1 U1.40 | length 621.7
  Top Layer w6: R20.1 2368.5,148.5 2368.5,61.5 J2.6 ; U1.40@2696.95,224.96 v1@2696.95,286.34
  Bottom Layer w6: J2.6 2423,113 2513,113 2551,151 2645,151 2697.74,203.74 v1(2697.74,285.55)
U0TXD: J2.7 R19.1 U1.39 | length 782.6
  Top Layer w6: J2.7 2271,61 2271,149 R19.1 ; U1.39@2663.49,224.96 v1(2663.49,334.8)
  Bottom Layer w6: J2.7 2317,107 2367,107 2395,135 2502,135 2538,171 2627,171 2663.49,207.49 v1(2663.49,334.8)
VBUS_SENSE: R10.1 R13.1 U2.16 | length 152.3
  Top Layer w6: U2.16 1061.3,680.94 1061.53,680.72 1061.53,678.47 1079,661 1102.37,637.63 R10.1 1129.11,637.78 1182.73,637.78 R13.1
pads on no net: J1.24 J3.A8 J3.B8 J4.A8 J4.B8 U2.2 U2.4 U2.5 U2.6 U2.7 U2.14

## Polygon pours and split planes (outlines as drawn)
GND on Top Layer "GND_L01_P012" (solid, pour order 12): 1062.8,277.2 1061.8,245.2 1199.8,245.2 1199.8,341.2 1207.8,349.2 1421.8,349.2 1425.8,353.2 1425.8,523.2 1414.8,523.2 1128.8,523.2 952.8,347.2 835.8,347.2 800.8,382.2 780.8,382.2 736.8,338.2 669.8,338.2 659.8,328.2 659.8,299.2 669.8,289.2 713.8,289.2 713.8,250.2 813.8,250.2 812.54,284.39 884.86,283.63 933.81,283.11 1058.2,281.8 1053.8,286.2
GND on Top Layer "GND_L01_P009" (solid, pour order 9): 2475,385 2780,385 2780,627 2475,627 2475,606
+5V_VBUS2 on Top Layer "+5V_VBUS2_L01_P007" (solid, pour order 7): 375.99,421.88 437.12,421.88 448,411 448,346 442,340 346,340 346,317 353,310 508,310 508,450 488,470 358,470 353,465 353,432 363,422 376.32,422
+5V_VBUS1 on Top Layer "+5V_VBUS1_L01_P006" (solid, pour order 6): 378,530 423,530 423,663 415.22,670.78 316,670.78 316,643 318,641 375,641 378,640 378,629
+3V3_REG on Top Layer "+3V3_REG_L01_P005" (solid, pour order 5): 823,241 823,248 908,248 908,200 905,197 822,197 816,191 816,163 811,158 720,158 712,166 712,235 718,241 721,241
+3V3_FTDI on Top Layer "+3V3_FTDI_L01_P004" (solid, pour order 4): 1072,766 1072,827 1080,835 1140,835 1144,831 1144,748 1122,748 1115,755 1115,757 1081,757
+3V3 on Top Layer "+3V3_L01_P000" (solid, pour order 0): 2730,816 ccw(c2740,816) 2740,806 2807,806 ccw(c2807,817.25) 2814,808.44 2814,831.65 ccw(c2805,821.26) 2805,835 2736,835 ccw(c2736,829) 2730,829
GND on Layer 1 "GND_L02_P017" (solid, remove dead copper, pour order 17): 2919,965 2919,11 21,11 21,965
+3V3 on Layer 1 "+3V3_L02_P015" (solid, remove dead copper, pour order 15): 2827,77 2826,70 2827,12 2828,11 2919,11 2919,965 1123,965 1123,862 1149,840 1162,827 1162,722 1448,722 1548,622 1670,622 1670,620 1736,554 1736,390 1892,390 1969,313 2026,313 2026,352 1905,473 1905,727 2737,727 2774,690 2784,148 2828,81
+3V3_REG on Layer 1 "+3V3_REG_L02_P014" (solid, pour order 14): 682,242 843,242 843,104 682,104
GND on Layer 2 (split plane): 2909.9,20.1 20.1,20.1 20.1,979.9 2909.9,979.9

## Silkscreen, mask and mechanical layers (free items; w line width, h text height)
Mechanical 1:
  the board outline again, w20

## Text inside footprints (layer, text, board x,y; h text height)
J5: Top Overlay "1" at 326,531 h40
J6: Top Overlay "1" at 1626,481 h40